# Altium PCB TF.PcbDoc
Units mil, origin at the board's own origin, x right, y up, seen from the top; angles counter-clockwise.
Board outline 6000 x 4000 mil, 2 copper layers (Top Layer, Bottom Layer); 6 components, 6 nets, 28 pads, 0 vias.
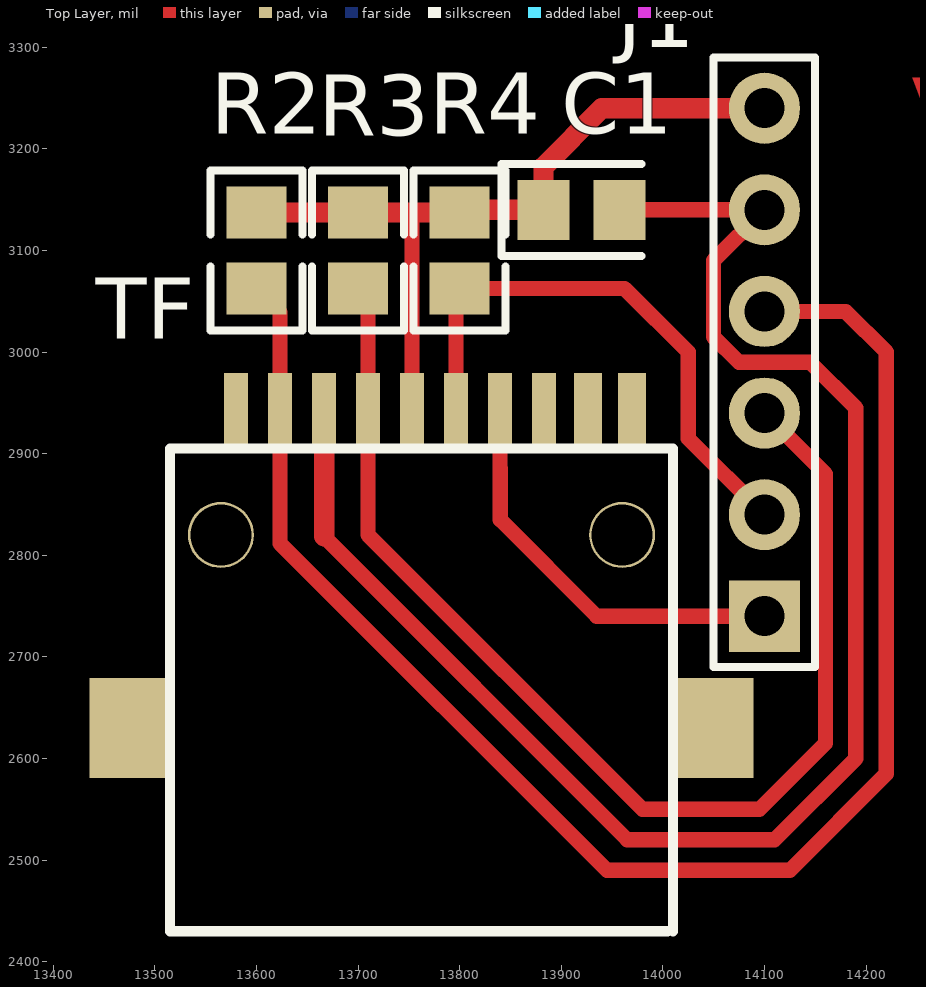
[diagram p0: Top Layer view]
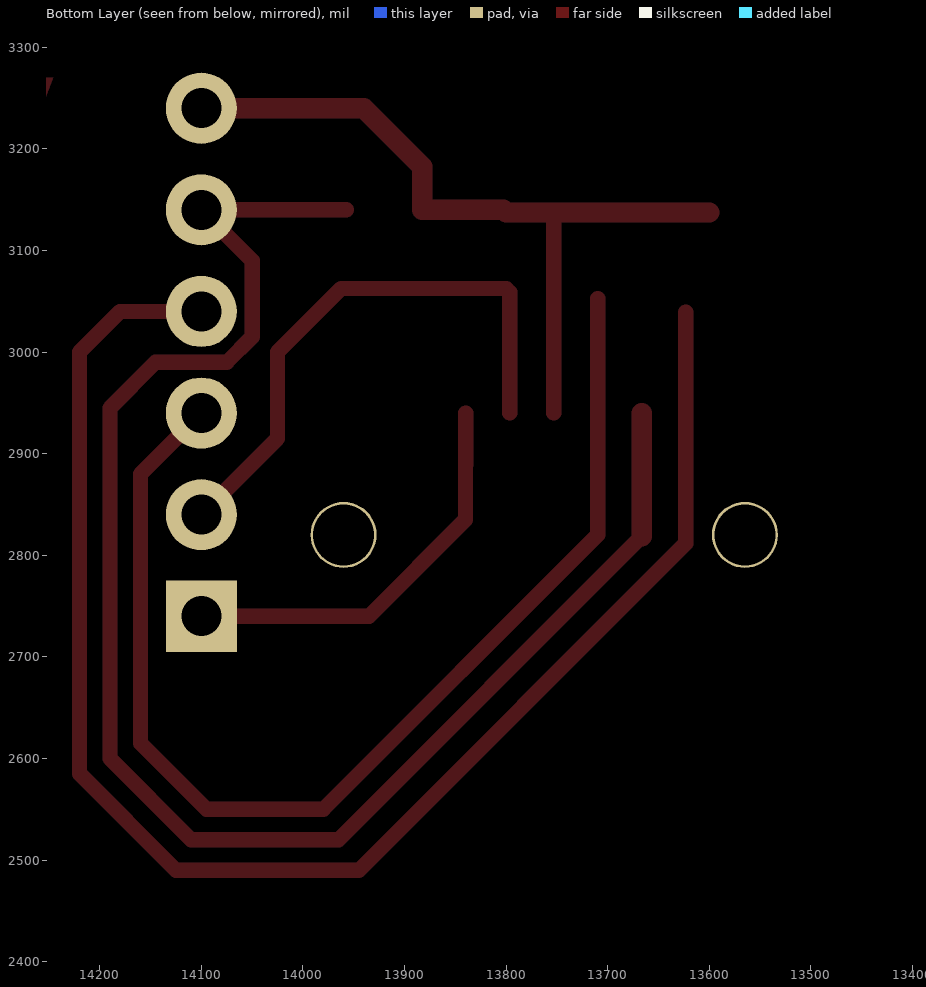
[diagram p1: Bottom Layer view, seen from below]

## Layer stack, top to bottom
Top Layer: signal copper 1.4
Dielectric: dielectric 12.6, FR-4, Dk 4.8
Bottom Layer: signal copper 1.4

## Board outline
1000,1000 7000,1000 7000,5000 1000,5000

## Design rules (kind name [scope] priority, off if disabled: settings)
Clearance [All] p1: gap=10
ComponentClearance [All] p1: gap=10 collisioncheckmode=0
PolygonConnect [All] p1: connectstyle=Relief reliefconductorwidth=10 reliefentries=4 polygonreliefangle="90 Angle"
RoomDefinition TF [InComponentClass('TF')] p1: confinementstyle=ConfineIn formatcopy=TRUE outline 2225,1715 4225,1715 4225,2715 2225,2715
RoutingLayers [All] p1: top layer=Horizontal bottom layer=Vertical
RoutingVias [All] p1: holewidth=28 width=50 viastyle="Through Hole" minholewidth=28 minwidth=50 maxholewidth=28 maxwidth=50
SolderMaskExpansion [All] p1: expansion=4
TestPointUsage [All] p1: valid=0 allowmultiple=FALSE
Testpoint [All] p1: side=15 testpointundercomponent=TRUE minsize=40 maxsize=100 preferedsize=60 minholesize=0 maxholesize=40 preferedholesize=32 testpointgrid=1 style=1023 order=1234567890
Width [All] p1: maxlimit=10 minlimit=10 preferedwidth=10
16 further rules are at their usual default settings.

## Components (designator, comment, footprint, x,y, rotation, side; value= is the part's Value field where it differs from the comment)
C1 "Cap Pol3" CC2012-0805 13920,3140 r0 top
J1 "Header 6" HDR1X6 14100,2740 r90 top
R2 "Res3" R2012-0805 13600,3100 r270 top
R3 "Res3" R2012-0805 13700,3100 r270 top
R4 "Res3" R2012-0805 13800,3100 r270 top
TF "TFcard" "TF Card" 13580,2940 r0 top

## Footprints (in the part's own frame and the unit in brackets; to place one, negate y for a bottom-side part, rotate by r counter-clockwise, add the part's x,y. Pads: shape width x height; smd on the part's side, far side on the other; paste and mask are expansions set on the pad)
CC2012-0805 [mm]
  rect 1.3x1.5 smd: 1(-0.95,0) 2(0.95,0)
  silkscreen extent -2,-1.15 1.5,1.15
HDR1X6 [mil] "Connector; Header; 6 Position"
  rect 70x70 hole 39.37: 1(0,0)
  round 70 hole 39.37: 2(100,0) 3(200,0) 4(300,0) 5(400,0) 6(500,0)
  silkscreen extent -50,-50 550,50
R2012-0805 [mm]
  rect 1.3x1.5 smd: 1(-0.95,0) 2(0.95,0)
  silkscreen extent -2,-1.15 2,1.15
"TF Card" [mm]
  rect 2x2.5 smd: 0(-2.667,-7.874) 0(11.938,-7.874)
  round 1.651 hole 1.524: 0(-0.381,-3.048) 0(9.652,-3.048)
  rect 0.6x2 smd: 1(6.6,0) 2(5.5,0) 4(4.4,0) 5(3.3,0) 6(2.2,0) 7(1.1,0) 8(0,0) 9(7.7,0)
  rect 0.7x2 smd: 10(8.8,0) 11(9.9,0)
  silkscreen extent -1.65,-12.95 10.92,-0.89

## Part data
C1: "Polarized Capacitor (Surface Mount)"
J1: "Header, 6-Pin"
R2 R3 R4: "Resistor"

## Nets (pads, with @x,y where several pads share a name; then routed paths per layer and width w, separated by ;. In a path a pad name is that pad's centre, name@x,y a point inside that pad or via, vN(x,y) a via of type N, cw(c..) or ccw(c..) an arc to the next point about the centre after c; other vN are vias at no path point)
NetC1_1: C1.1 J1.6 R2.1 R3.1 R4.1 TF.4 | length 757.9
  Top Layer w15: TF.4 13753.23,3134.17
  Top Layer w20: R2.1 R4.1 ; R4.1@13802.6,3140 C1.1 13882.6,3182.6 13940,3240 J1.6
NetC1_2: C1.2 J1.5 TF.6 | length 1604
  Top Layer w15: 13666.61,2818.39 13965,2520 14110,2520 14190,2600 14190,2945 14145,2990 14075,2990 14050,3015 14050,3090 J1.5 C1.2
  Top Layer w20: 13666.61,2818.39 TF.6
NetJ1_1: J1.1 TF.1 | length 404.4
  Top Layer w15: TF.1 13840,2835 13935,2740 J1.1
NetJ1_2: J1.2 R4.2 TF.2 | length 561.1
  Top Layer w15: TF.2 R4.2@13796.53,3059.13 ; R4.2 13962.4,3062.6 14025,3000 14025,2915 J1.2
NetJ1_3: J1.3 R3.2 TF.5 | length 1171.3
  Top Layer w15: R3.2@13709.92,3052.68 13709.92,2820.08 13980,2550 14095,2550 14160,2615 14160,2880 J1.3
NetJ1_4: J1.4 R2.2 TF.7 | length 1548.5
  Top Layer w15: R2.2@13623.31,3039.29 13623.31,2811.69 13945,2490 14125,2490 14220,2585 14220,3000 14180,3040 J1.4
pads on no net: TF.0 TF.8 TF.9 TF.10 TF.11

## Other copper
Top Layer:
  text "VCC" at 14245,3210 h60
  text "GND" at 14250,3105 h60
  text "MISO" at 14250,3010 h60
  text "SCK" at 14250,2910 h60
  text "MOSI" at 14250,2805 h60
  text "SDCS" at 14250,2705 h60